# Altium PCB PCB1.PcbDoc
Units mil, origin at the board's own origin, x right, y up, seen from the top; angles counter-clockwise.
Board outline 4083.65 x 2776.57 mil, 2 copper layers (Top Layer, Bottom Layer); 64 components, 28 nets, 238 pads, 20 vias.
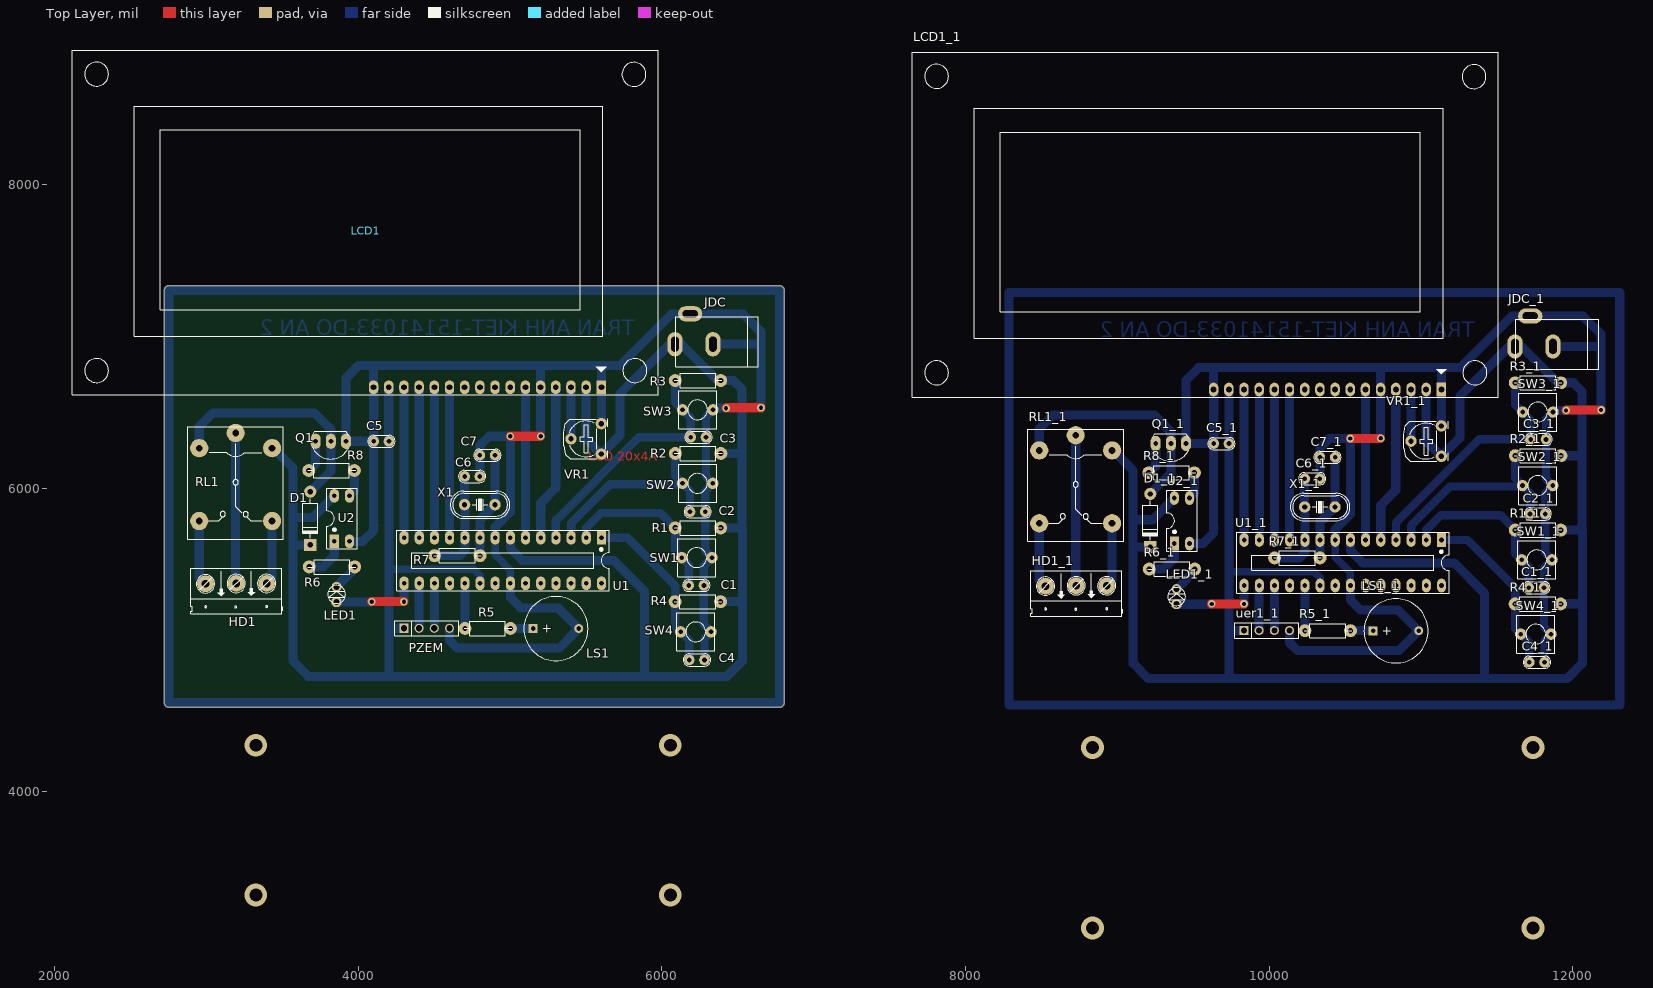
[diagram p0: Top Layer view]
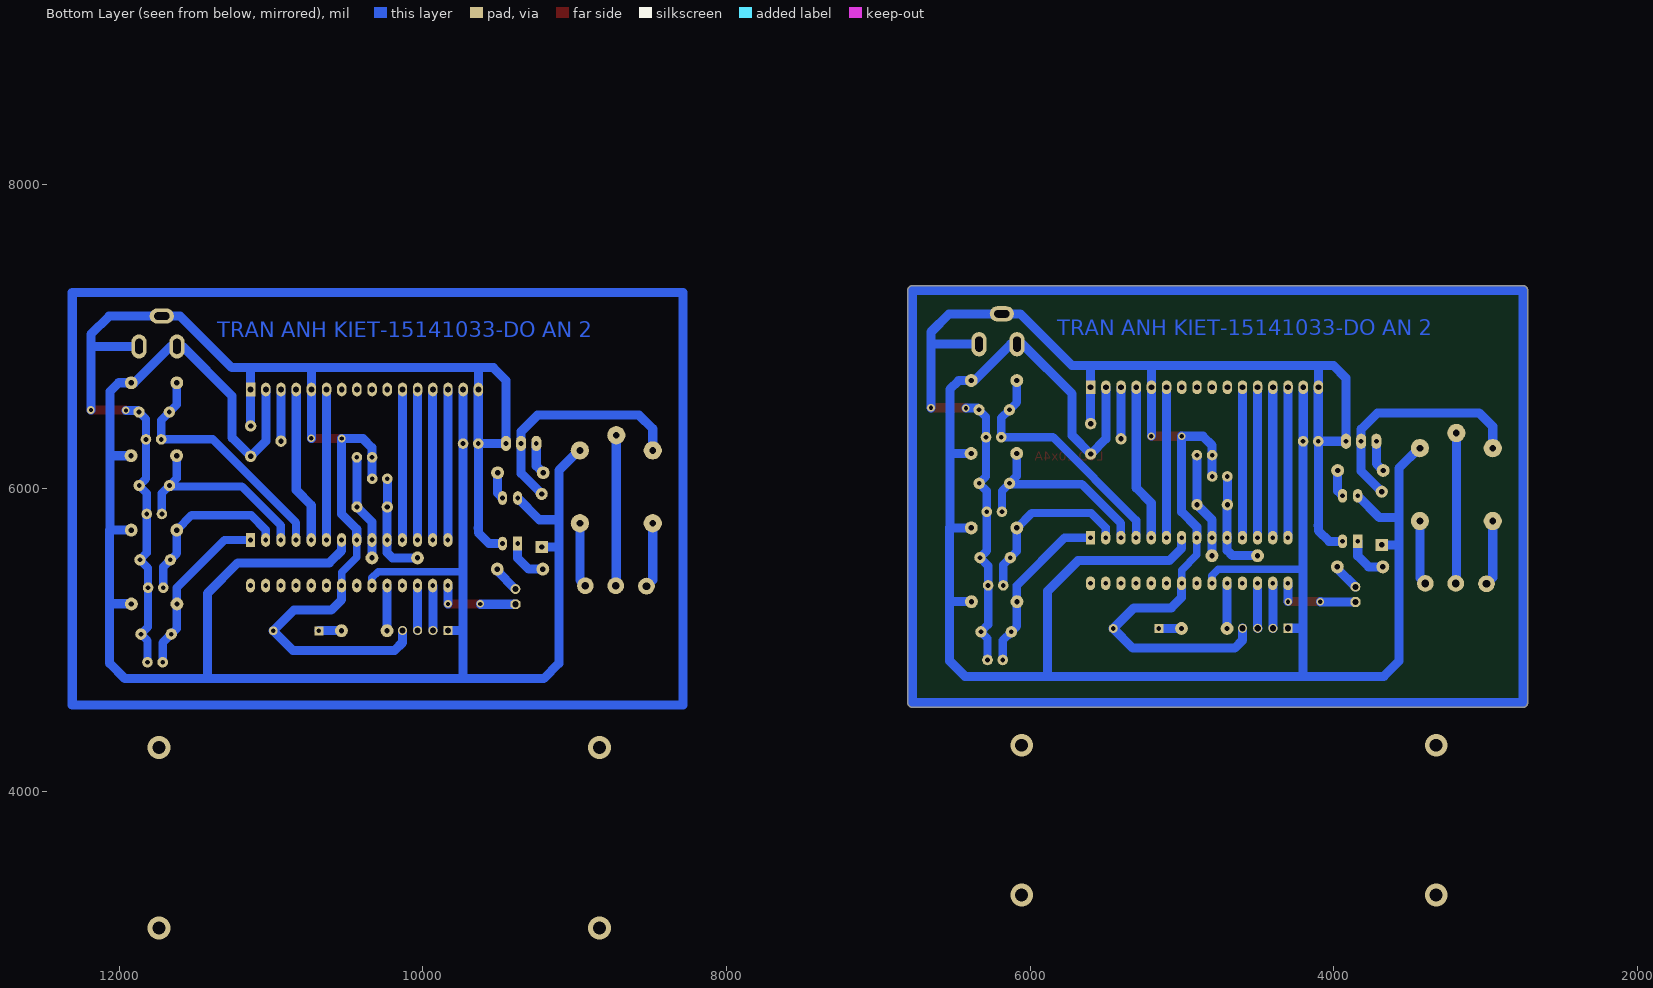
[diagram p1: Bottom Layer view, seen from below]

## Layer stack, top to bottom
Top Layer: signal copper 1.4
Dielectric: dielectric 12.6, FR-4, Dk 4.8
Bottom Layer: signal copper 1.4

## Board outline
2751.97,4556.6 cw(c2751.97,4586.61) 2721.95,4586.61 2721.95,7303.15 cw(c2751.97,7303.15) 2751.97,7333.16 6775.59,7333.16 cw(c6775.59,7303.15) 6805.61,7303.15 6805.61,4586.61 cw(c6775.59,4586.61) 6775.59,4556.6

## Design rules (kind name [scope] priority, off if disabled: settings)
Clearance [All] p1: gap=10
PolygonConnect [All] p1: connectstyle=Relief reliefconductorwidth=10 reliefentries=4 polygonreliefangle="90 Angle"
RoomDefinition SCHE [InComponentClass('SCHE')] p1: confinementstyle=ConfineIn formatcopy=TRUE lockcomponents=FALSE outline 7045,1065 10715,1065 10715,4365 7045,4365
RoutingVias [All] p1: holewidth=28 width=50 viastyle="Through Hole" minholewidth=28 minwidth=50 maxholewidth=28 maxwidth=50
SilkscreenOverComponentPads [All] p1: minsilkscreentomaskgap=10
SolderMaskExpansion [All] p1: expansion=4
Width [All] p1: maxlimit=60 minlimit=50 preferedwidth=55
27 further rules are at their usual default settings.

## Classes and differential pairs
component class SCHE: 100N C1 C2 C3 C4 C7 D1 HD1 JDC LED1 LS1 PZEM Q1 R1 R2 R3 R5 R7 RL1 SW1 SW2 SW3 SW4 U1 uer VR1 X1

## Components (designator, comment, footprint, x,y, rotation, side; value= is the part's Value field where it differs from the comment)
C1 "100n" CN1 6176.18,5359.25 r0 top
C1_1 "100n" CN1 11709.65,5344.49 r0 top (schematic designator C1)
C2 "100n" CN1 6185.04,5844.49 r0 top
C2_1 "100n" CN1 11718.5,5829.72 r0 top (schematic designator C2)
C3 "100n" CN1 6189.96,6335.63 r0 top
C3_1 "100n" CN1 11723.43,6320.87 r0 top (schematic designator C3)
C4 "100n" CN1 6180.12,4868.11 r0 top
C4_1 "100n" CN1 11713.58,4853.35 r0 top (schematic designator C4)
C5 "100n" CN1 4101.38,6308.07 r0 top
C5_1 "100n" CN1 9634.84,6293.31 r0 top (schematic designator C5)
C6 "22p" CN1 4800.2,6076.77 r180 top
C6_1 "22p" CN1 10333.66,6062.01 r180 top (schematic designator C6)
C7 "22p" CN1 4900.59,6217.52 r180 top
C7_1 "22p" CN1 10434.06,6202.76 r180 top (schematic designator C7)
D1 "1N4007" D1A 3683.07,5976.38 r90 top
D1_1 "1N4007" D1A 9216.54,5961.61 r90 top (schematic designator D1)
HD1 "Header 3" HED3 3395.67,5372.05 r180 top
HD1_1 "Header 3" HED3 8929.13,5357.28 r180 top (schematic designator HD1)
JDC "Jac DC" DC0 6210.63,7048.23 r180 top
JDC_1 "Jac DC" DC0 11744.09,7033.46 r180 top (schematic designator JDC)
LCD1 "LCD 20x4A" LCD20X4A 5600.39,6664.37 r180 top locked
LCD1_1 "LCD 20x4A" LCD20X4A 11133.86,6649.61 r180 top (schematic designator LCD1)
LED1 "LED" LED-3MM-YELLOW 3856.3,5250 r90 top
LED1_1 "LED" LED-3MM-YELLOW 9389.76,5235.24 r90 top (schematic designator LED1)
LS1 "SPEAKER" speaker 5151.57,5074.8 r0 top
LS1_1 "SPEAKER" speaker 10685.04,5060.04 r0 top (schematic designator LS1)
PZEM "JP4" JP4-C1T 4300.2,5076.77 r0 top (schematic designator uer1)
Q1 "C1815" QTO-92 3818.9,6309.06 r180 top
Q1_1 "C1815" QTO-92 9352.36,6294.29 r180 top (schematic designator Q1)
R1 "10k" RES-1/4W-SMALL 6247.05,5738.19 r180 top
R1_1 "10k" RES-1/4W-SMALL 11780.51,5723.43 r180 top (schematic designator R1)
R2 "10k" RES-1/4W-SMALL 6248.03,6228.35 r180 top
R2_1 "10k" RES-1/4W-SMALL 11781.5,6213.58 r180 top (schematic designator R2)
R3 "10k" RES-1/4W-SMALL 6247.05,6708.66 r180 top
R3_1 "10k" RES-1/4W-SMALL 11780.51,6693.9 r180 top (schematic designator R3)
R4 "10k" RES-1/4W-SMALL 6246.06,5251.97 r180 top
R4_1 "10k" RES-1/4W-SMALL 11779.53,5237.2 r180 top (schematic designator R4)
R5 "39" RES-1/4W-SMALL 4862.2,5075.79 r180 top
R5_1 "39" RES-1/4W-SMALL 10395.67,5061.02 r180 top (schematic designator R5)
R6 "1k" RES-1/4W-SMALL 3815.94,5481.3 r0 top
R6_1 "1k" RES-1/4W-SMALL 9349.41,5466.54 r0 top (schematic designator R6)
R7 "1M" RES-1/4W-SMALL 4661.42,5555.12 r180 top
R7_1 "1M" RES-1/4W-SMALL 10194.88,5540.35 r180 top (schematic designator R7)
R8 "1k" RES-1/4W-SMALL 3833.66,6116.14 r180 top
R8_1 "1k" RES-1/4W-SMALL 9367.13,6101.38 r180 top (schematic designator R8)
RL1 "Relay 10A/12V" RL_SPDT_10A 3191.93,6363.19 r270 top
RL1_1 "Relay 10A/12V" RL_SPDT_10A 8725.39,6348.43 r270 top (schematic designator RL1)
SW1 "UP" SW2 6129.92,5542.32 r0 top
SW1_1 "UP" SW2 11663.39,5527.56 r0 top (schematic designator SW1)
SW2 "DW" SW2 6134.84,6031.5 r0 top
SW2_1 "DW" SW2 11668.31,6016.73 r0 top (schematic designator SW2)
SW3 "DW" SW2 6135.83,6515.75 r0 top
SW3_1 "DW" SW2 11669.29,6500.98 r0 top (schematic designator SW3)
SW4 "RST" SW2 6123.39,5053.03 r0 top
SW4_1 "RST" SW2 11656.85,5038.26 r0 top (schematic designator SW4)
U1 "ATmega328-PU" DIP28 5601.38,5673.23 r180 top
U1_1 "ATmega328-PU" DIP28 11134.84,5658.46 r180 top (schematic designator U1)
U2 "PC817" DIP4/W0.3 3841.54,5649.61 r0 top
U2_1 "PC817" DIP4/W0.3 9375,5634.84 r0 top (schematic designator U2)
uer1_1 "JP4" JP4-C1T 9833.66,5062.01 r0 top (schematic designator uer1)
VR1 "10K" VR 5600.39,6224.41 r90 top
VR1_1 "10K" VR 11133.86,6209.65 r90 top (schematic designator VR1)
X1 "16M" XT2 4800.2,5890.75 r180 top
X1_1 "16M" XT2 10333.66,5875.98 r180 top (schematic designator X1)

## Footprints (in the part's own frame and the unit in brackets; to place one, negate y for a bottom-side part, rotate by r counter-clockwise, add the part's x,y. Pads: shape width x height; smd on the part's side, far side on the other; paste and mask are expansions set on the pad)
CN1 [mil]
  round 70 hole 31: 1(0,0) 2(100,0)
  silkscreen extent -40,-40 141,40, body extent -60,-30 170,37, height 265
D1A [mil] "Diode 1A, W 100mil, L 350mil"
  round 80 hole 35: 1(0,0)
  rect 80x80 hole 35: 2(-350,0)
  silkscreen extent -305,-50 -45,50, body extent -386,-33 34,36, height 84
DC0 [mil] "Jac DC input"
  oval 100x160 hole 50 slot 100 at 90 deg: 1(125,100) 2(-125,100)
  oval 160x100 hole 50 slot 100 at 0 deg: 3(25,-100)
  silkscreen extent -425,-80 120,250, body extent -410,-105 134,269, height 434
DIP4/W0.3 [mil] "4 PIN, W 300mil, Pin to pin 100mil"
  rect 60x90 hole 31: 1(0,0)
  oval 60x90 hole 31: 2(100,0) 3(100,300) 4(0,300)
  silkscreen extent -50,-50 150,350, body extent -59,-10 159,305, height 170
DIP28 [mil] "DIP, 18-Leads, Row Spacing 7.62mm, Pitch 2.54mm, Body 22.8x7.3mm, Window"
  rect 60x90 hole 31: 1(0,0)
  oval 60x90 hole 31: 2(100,0) 3(200,0) 4(300,0) 5(400,0) 6(500,0) 7(600,0) 8(700,0) 9(800,0) 10(900,0) 11(1000,0) 12(1100,0) 13(1200,0) 14(1300,0) 15(1300,300) 16(1200,300) 17(1100,300) 18(1000,300) 19(900,300) 20(800,300) 21(700,300) 22(600,300) 23(500,300) 24(400,300) 25(300,300) 26(200,300) 27(100,300) 28(0,300)
  silkscreen extent -50,-50 1350,350, body extent -50,-10 1367,300, height 200
HED3 [mil] "Header 3, 3 pin, hight 300mil, Pin to Pin 200, Colour Green"
  round 110 hole 50: 1(0,0) 2(200,0) 3(402.62,2.62)
  silkscreen extent -106,-100 500,200
JP4-C1T [mm] "4 row, straight, gold plating"
  rect 1.52x1.52 hole 1.02: 1(0,0)
  round 1.52 hole 1.02: 2(2.54,0) 3(5.08,0) 4(7.62,0)
  silkscreen extent -1.52,-1.27 9.14,1.27, body extent -1.52,-1.25 9.14,1.25, height 8.51
LCD20X4A [mil] "LCD dipslay 20x4, 16 pin"
  rect 62x90 hole 39: 1(0,0)
  oval 62x90 hole 39: 2(100,0) 3(200,0) 4(300,0) 5(400,0) 6(500,0) 7(600,0) 8(700,0) 9(800,0) 10(900,0) 11(1000,0) 12(1100,0) 13(1200,0) 14(1300,0) 15(1400,0) 16(1500,0)
  round 157.48 on Top Paste: "Hole 0"(-220,-110) "Hole 0"(-215,-2060) "Hole 0"(3325,-110) "Hole 0"(3325,-2065)
  silkscreen extent -375,-2220 3485,50, body extent -392,-2264 3466,98, height 417
LED-3MM-YELLOW [mil]
  oct 65x65 hole 40: 1(0,0)
  round 65 hole 40: 2(100,0)
  silkscreen extent -9,-59 109,59, body extent -27,-77 117,80, height 181
QTO-92 [mil] "TO-92"
  oval 66x100 hole 32: 1(-100,0) 2(0,0) 3(100,0)
  silkscreen extent -117,-65 120,118, body extent -109,-66 109,95, height 245
RES-1/4W-SMALL [mil]
  round 85 hole 35: 1(-140,0) 2(160,0)
  silkscreen extent -148,-47 166,47, body extent -152,-47 172,47, height 97
RL_SPDT_10A [mil] "Relay SPDT, 5 pin, 10A,W 650mil, L 800mil, H 800mil"
  round 120 hole 45: 1(0,0) 2(580,240) 3(580,-240) 4(100,-240) 5(100,240)
  silkscreen extent -40,-315 700,315, body extent -46,-304 706,306, height 602
speaker [mm]
  rect 1.5x1.5 hole 0.8: 1(0,0)
  round 1.5 hole 0.8: 2(7.62,0.013)
  silkscreen extent -1.55,-5.38 9.18,5.36, body extent -2.22,-6 13.24,6, height 4.5
SW2 [mil] "SW button 2pin, 250x 250 mil"
  round 75 hole 31: 1(0,0) 2(200,0)
  silkscreen extent -25,-125 225,125
VR [mil] "Resistor Variable"
  round 75 hole 35: 1(0,0) 2(100,200) 3(200,0)
  silkscreen extent -31,-44 231,246, body extent -87,-30 307,372, height 165
XT2 [mil] "Footpin for Crystal 2 pin"
  round 75 hole 34: 1(-100,0) 2(100,0)
  silkscreen extent -198,-90 195,90, body extent -233,-93 213,90, height 138

## Part data
C1 C1_1 C2 C2_1 C3 C3_1 C4 C4_1 C5 C5_1 C6 C6_1 C7 C7_1: library part CN1, "Cap np  1pF - 472pF"
D1 D1_1: library part D1A, "Diode 1A"
HD1 HD1_1: library part Hed3, "Header 3 (Green)"
JDC JDC_1: library part DCIN, "Jac DC input"
LCD1 LCD1_1: library part LCD20x4A, "LCD dipslay 20 char, 4 line"
LED1 LED1_1: "LED Single colour Green and Red"
PZEM uer1_1: "WR-PHD 2.54 mm Angled Socket Header"
Q1 Q1_1: "NPN 600mW, ECB"
R1 R1_1 R2 R2_1 R3 R3_1 R4 R4_1 R5 R5_1 R6 R6_1 R7 R7_1 R8 R8_1: library part Res, "Res"
RL1 RL1_1: library part "Relay 1", "Relay SPDT,10A - 12VDC 5 Pin"
SW1 SW1_1 SW2 SW2_1 SW3 SW3_1 SW4 SW4_1: library part SW2, "Switch button 2 pin"
U1 U1_1: "8-bit AVR Microcontroller, 32KB Flash, 1KB EEPROM, 2KB SRAM, 28-pin PDIP, Industrial Grade (-40°C to 85°C)"
U2 U2_1: "Single Opto"
VR1 VR1_1: library part VR, "Var Resistor"
X1 X1_1: library part XT2, "Crystal For all Crystal 2pin."

## Via types
v1: diameter 50, hole 28, Top Layer to Bottom Layer, 12 vias
v2: diameter 150, hole 85, Top Layer to Bottom Layer, 8 vias

## Nets (pads, with @x,y where several pads share a name; then routed paths per layer and width w, separated by ;. In a path a pad name is that pad's centre, name@x,y a point inside that pad or via, vN(x,y) a via of type N, cw(c..) or ccw(c..) an arc to the next point about the centre after c; other vN are vias at no path point)
DW: C2.1 R2.2 SW2.1 U1.3 | length 1361.7
  Bottom Layer w55: U1.3 5401.38,5768.5 5658.46,6025.59 6128.94,6025.59 SW2.1 ; R2.2 6088.03,6078.31 SW2.1 ; C2.1 6185.04,5981.3 SW2.1
GND: C1.2 C2.2 C3.2 C4.2 C5.1 C6.1 C7.2 JDC.2 JDC.3 LCD1.1 LCD1.5 LCD1.16 LS1.2 PZEM.4 Q1.1 SW1.2 SW2.2 SW3.2 SW4.2 U1.8 U1.22 U2.2 VR1.3 | length 11909.9
  Top Layer w60: v1(5000.98,6341.54) v1@5199.8,6341.54 ; v1(6422.24,6526.57) 6425.2,6529.53 v1(6652.56,6529.53)
  Bottom Layer w50: U1.8 4901.38,5560.24 5001.38,5460.24 U1.22
  Bottom Layer w55: C4.2 6280.12,5009.76 SW4.2 6276.18,5100.23 C1.2 6276.18,5488.58 SW1.2 6285.04,5587.2 C2.2 6285.04,5981.69 SW2.2 6289.96,6076.38 C3.2 6289.96,6469.88 SW3.2
  Bottom Layer w60: U2.2 4029.53,5649.61 4100.39,5720.47 4100.39,5753.94 ; C5.1@4100.39,6309.06 Q1.1 3918.9,6725 4001.97,6808.07 4102.36,6808.07 ; 4101.38,5752.95 4100.39,5753.94 ; PZEM.4 4600.2,4997.83 4652.17,4945.87 5322.14,4945.87 LS1.2 5315.26,5211.61 5069.88,5211.61 5001.38,5280.12 U1.22 ; C6.1 4800.2,6217.13 C7.2 4801.57,6218.5 4801.57,6281.89 4861.22,6341.54 v1(5000.98,6341.54) 5000.98,5843.5 4901.38,5743.9 U1.8 ; LCD1.5 5200.39,6805.71 5202.76,6808.07 ; v1(5200.79,6342.52) LCD1.5@5200.79,6663.98 ; VR1.3 LCD1.1 5600.39,6795.28 ; JDC.2 6647.05,6948.23 6652.56,6953.74 ; SW3.2 6346.65,6526.57 v1(6422.24,6526.57) ; v1(6652.56,6529.53) 6652.56,6953.74 ; 4100.39,5753.94 4100.39,6297.24 4101.38,6298.23 C5.1 4101.38,6663.39 LCD1.16 4100.39,6806.1 4102.36,6808.07 ; 4102.36,6808.07 5202.76,6808.07 ; 5202.76,6808.07 5724.41,6808.07 6064.57,7148.23 JDC.3 6532.87,7148.23 6652.56,7028.54 6652.56,6953.74
MODE: C3.1 R3.2 SW3.1 U1.4 | length 1645.6
  Bottom Layer w55: U1.4 5301.38,5787.6 5849.41,6335.63 C3.1 6189.96,6461.61 SW3.1 6087.05,6564.53 R3.2
NetC4_1: C4.1 R4.2 SW4.1 U1.1 | length 1145.2
  Bottom Layer w55: U1.1 5772.64,5673.23 6087.05,5358.82 6087.05,5252.95 6087.05,5089.37 SW4.1 6180.12,4996.3 C4.1
NetC6_2: C6.2 R7.2 U1.10 X1.2 | length 699.9
  Bottom Layer w60: R7.2 4666.34,5555.12 4701.38,5590.16 U1.10 X1.2@4701.38,5889.57 ; X1.2 C6.2
NetC7_1: C7.1 R7.1 U1.9 X1.1 | length 703.5
  Bottom Layer w60: R7.1 4801.38,5555.16 U1.9 4801.38,5791.93 X1.1 4900.59,5891.14 C7.1
NetD1_1: D1.1 Q1.2 RL1.4 | length 1559.4
  Bottom Layer w60: RL1.4 2951.93,6405.67 3042.32,6496.06 3710.63,6496.06 3818.9,6387.8 Q1.2 3818.9,6112.2 D1.1
NetHD1_1: HD1.1 RL1.2 | length 426.2
  Bottom Layer w60: HD1.1 3431.93,5408.31 RL1.2
NetHD1_2: HD1.2 RL1.1 | length 987.4
  Bottom Layer w60: HD1.2@3191.93,5375.79 RL1.1
NetHD1_3: HD1.3 RL1.3 | length 430.8
  Bottom Layer w60: RL1.3 2951.93,5410.55 HD1.3
NetLCD1_3: LCD1.3 VR1.2 | length 340
  Bottom Layer w60: VR1.2 LCD1.3
NetLCD1_4: LCD1.4 U1.5 | length 1031.6
  Bottom Layer w60: U1.5 5201.38,5902.17 5301.38,6002.17 ; 5300.39,6003.15 LCD1.4
NetLCD1_6: LCD1.6 U1.6 | length 990.2
  Bottom Layer w60: U1.6@5100.39,5674.21 LCD1.6
NetLCD1_11: LCD1.11 U1.11 | length 990.2
  Bottom Layer w60: U1.11 LCD1.11@4601.38,6663.39
NetLCD1_12: LCD1.12 U1.12 | length 990.2
  Bottom Layer w60: U1.12@4500.39,5674.21 LCD1.12
NetLCD1_13: LCD1.13 U1.13 | length 990.2
  Bottom Layer w60: U1.13 LCD1.13@4401.38,6663.39
NetLCD1_14: LCD1.14 U1.14 | length 990.2
  Bottom Layer w60: U1.14@4300.39,5674.21 LCD1.14
NetLED1_1: LED1.1 U1.15 | length 564.8
  Top Layer w60: v1(4087.6,5251.97) v1(4300.2,5251.97)
  Bottom Layer w60: LED1.1 4085.63,5250 v1(4087.6,5251.97) ; v1@4301.38,5253.15 U1.15
NetLED1_2: LED1.2 R6.2 | length 180.9
  Bottom Layer w60: LED1.2 3975.94,5469.65 R6.2
NetLS1_1: LS1.1 R5.1 | length 148.4
  Bottom Layer w60: R5.1 LS1.1@5150.59,5075.79
NetQ1_3: Q1.3 R8.2 | length 215.9
  Bottom Layer w60: R8.2@3670.67,6119.13 R8.2 3718.9,6161.38 Q1.3
NetR5_2: R5.2 U1.19 | length 299
  Bottom Layer w60: R5.2 4701.38,5076.61 U1.19 U1.19@4702.2,5372.4
NetR6_1: R6.1 U2.1 | length 291.2
  Bottom Layer w60: R6.1 3768.7,5481.3 3841.54,5554.13 U2.1
NetR8_1: R8.1 U2.3 | length 179.8
  Bottom Layer w60: U2.3 3973.66,5981.73 R8.1
NetU1_16: PZEM.2 U1.16 | length 300.9
  Bottom Layer w60: PZEM.2 4400.2,5372.05 U1.16 U1.16@4401.38,5377.17
NetU1_17: PZEM.3 U1.17 | length 296.9
  Bottom Layer w60: PZEM.3 4501.38,5077.95 U1.17
UP: C1.1 R1.2 SW1.1 U1.2 | length 1149.4
  Bottom Layer w55: U1.2 5501.38,5740.55 5597.44,5836.61 5988.62,5836.61 R1.2 6087.05,5585.2 SW1.1 6176.18,5496.06 C1.1
VCC: C5.2 D1.2 JDC.1 LCD1.2 LCD1.15 PZEM.1 R1.1 R2.1 R3.1 R4.1 RL1.5 U1.7 U1.20 U2.4 VR1.1 | length 13472.9
  Bottom Layer w50: 4201.38,5464.57 4759.84,5464.57 4801.38,5423.03 U1.20
  Bottom Layer w60: RL1.5 3437.6,6263.19 3569.88,6130.91 3569.88,5806.1 ; 3571.26,5626.38 D1.2 D1.2@3677.36,5632.09 ; U2.4 3698.03,5806.1 3569.88,5806.1 ; LCD1.15 4200.39,6309.06 C5.2 4201.38,5464.57 4201.38,5078.74 ; PZEM.1 4203.35,5076.77 4201.38,5078.74 ; U1.7 5001.38,5603.94 5082.68,5522.64 5684.06,5522.64 5884.84,5321.85 5884.84,4765.75 ; LCD1.2 5500.39,6324.41 VR1.1 5722.44,6346.46 5722.44,6621.06 6049.61,6948.23 JDC.1 6127.56,6948.23 6367.13,6708.66 R3.1 ; R4.1@6387.05,5252.95 6529.53,5252.95 ; R1.1 6527.56,5738.19 ; R3.1@6387.05,6717.28 R3.1 ; R2.1 6527.56,6228.35 ; 3569.88,5806.1 3569.88,4860.24 3670.28,4759.84 4200.79,4759.84 ; 4200.79,4759.84 6428.15,4759.84 6529.53,4861.22 6529.53,5252.95 ; 4200.79,4759.84 4201.38,4760.43 4201.38,5078.74 ; R3.1 6469.49,6708.66 6527.56,6650.59 6527.56,6228.35 ; 6527.56,5738.19 6529.53,5740.16 6529.53,5252.95 ; 6527.56,5738.19 6527.56,6228.35
pads on no net: "LCD1.Hole 0" "LCD1_1.Hole 0" C1_1.1 C1_1.2 C2_1.1 C2_1.2 C3_1.1 C3_1.2 C4_1.1 C4_1.2 C5_1.1 C5_1.2 C6_1.1 C6_1.2 C7_1.1 C7_1.2 D1_1.1 D1_1.2 HD1_1.1 HD1_1.2 HD1_1.3 JDC_1.1 JDC_1.2 JDC_1.3 LCD1.7 LCD1.8 LCD1.9 LCD1.10 LCD1_1.1 LCD1_1.2 LCD1_1.3 LCD1_1.4 LCD1_1.5 LCD1_1.6 LCD1_1.7 LCD1_1.8 LCD1_1.9 LCD1_1.10 LCD1_1.11 LCD1_1.12 LCD1_1.13 LCD1_1.14 LCD1_1.15 LCD1_1.16 LED1_1.1 LED1_1.2 LS1_1.1 LS1_1.2 Q1_1.1 Q1_1.2 Q1_1.3 R1_1.1 R1_1.2 R2_1.1 R2_1.2 R3_1.1 R3_1.2 R4_1.1 R4_1.2 R5_1.1 R5_1.2 R6_1.1 R6_1.2 R7_1.1 R7_1.2 R8_1.1 R8_1.2 RL1_1.1 RL1_1.2 RL1_1.3 RL1_1.4 RL1_1.5 SW1_1.1 SW1_1.2 SW2_1.1 SW2_1.2 SW3_1.1 SW3_1.2 SW4_1.1 SW4_1.2 U1.18 U1.21 U1.23 U1.24 U1.25 U1.26 U1.27 U1.28 U1_1.1 U1_1.2 U1_1.3 U1_1.4 U1_1.5 U1_1.6 U1_1.7 U1_1.8 U1_1.9 U1_1.10 U1_1.11 U1_1.12 U1_1.13 U1_1.14 U1_1.15 U1_1.16 U1_1.17 U1_1.18 U1_1.19 U1_1.20 U1_1.21 U1_1.22 U1_1.23 U1_1.24 U1_1.25 U1_1.26 U1_1.27 U1_1.28 U2_1.1 U2_1.2 U2_1.3 U2_1.4 uer1_1.1 uer1_1.2 uer1_1.3 uer1_1.4 VR1_1.1 VR1_1.2 VR1_1.3 X1_1.1 X1_1.2
copper on no net: | length 71256
  Top Layer w60: v1(9621.06,5237.2) v1(9833.66,5237.2) ; v1(10534.45,6326.77) v1@10733.27,6326.77 ; v1(11955.71,6511.81) 11958.66,6514.76 v1(12186.02,6514.76)
  Bottom Layer w50: 9734.84,5449.8 10293.31,5449.8 10334.84,5408.27 10334.84,5358.46 ; 10434.84,5658.46 10434.84,5545.47 10534.84,5445.47 10534.84,5358.46
  Bottom Layer w55: 10834.84,5658.46 10834.84,5772.83 11382.87,6320.87 11723.43,6320.87 11723.43,6446.85 11669.29,6500.98 11620.51,6549.76 11620.51,6693.9 ; 10934.84,5658.46 10934.84,5753.74 11191.93,6010.83 11662.4,6010.83 11668.31,6016.73 ; 11034.84,5658.46 11034.84,5725.79 11130.91,5821.85 11522.09,5821.85 11620.51,5723.43 11620.51,5570.43 11663.39,5527.56 11709.65,5481.3 11709.65,5344.49 ; 11134.84,5658.46 11306.1,5658.46 11620.51,5344.06 11620.51,5238.19 11620.51,5074.6 11656.85,5038.26 11713.58,4981.53 11713.58,4853.35 ; 11621.5,6213.58 11621.5,6063.54 11668.31,6016.73 ; 11718.5,5829.72 11718.5,5966.54 11668.31,6016.73 ; 11813.58,4853.35 11813.58,4995 11856.85,5038.26 11809.65,5085.47 11809.65,5344.49 11809.65,5473.82 11863.39,5527.56 11818.5,5572.44 11818.5,5829.72 11818.5,5966.93 11868.31,6016.73 11823.43,6061.61 11823.43,6320.87 11823.43,6455.12 11869.29,6500.98
  Bottom Layer w60: 4700.2,5674.41 4701.38,5673.23 ; 8485.39,5768.43 8485.39,5395.79 8526.51,5354.66 ; 8485.39,6248.43 8485.39,6390.91 8575.79,6481.3 9244.09,6481.3 9352.36,6373.03 9352.36,6294.29 9352.36,6097.44 9216.54,5961.61 ; 8725.39,5361.02 8725.39,6348.43 ; 8929.13,5357.28 8965.39,5393.54 8965.39,5768.43 ; 8965.39,6248.43 8971.06,6248.43 9103.35,6116.14 9103.35,5791.34 ; 9104.72,5611.61 9216.54,5611.61 9210.83,5617.32 ; 9204.13,6104.37 9207.13,6101.38 9252.36,6146.61 9252.36,6294.29 ; 9209.41,5466.54 9302.17,5466.54 9375,5539.37 9375,5634.84 ; 9375,5934.84 9231.5,5791.34 9103.35,5791.34 ; 9389.76,5235.24 9619.09,5235.24 v1(9621.06,5237.2) ; 9389.76,5335.24 9509.41,5454.88 9509.41,5466.54 ; 9475,5634.84 9562.99,5634.84 9633.86,5705.71 9633.86,5739.17 ; 9475,5934.84 9507.13,5966.97 9507.13,6101.38 ; 9633.86,6294.29 9452.36,6294.29 9452.36,6710.24 9535.43,6793.31 9635.83,6793.31 ; 9634.84,5738.19 9633.86,5739.17 ; 9733.86,6649.61 9733.86,6294.29 9734.84,6293.31 9734.84,5449.8 9734.84,5063.98 ; 9833.66,5062.01 9736.81,5062.01 9734.84,5063.98 ; 9833.86,5659.45 9833.86,6649.61 ; v1@9834.84,5238.39 9834.84,5358.46 ; 9933.66,5062.01 9933.66,5357.28 9934.84,5358.46 9934.84,5362.4 ; 9934.84,5658.46 9934.84,6648.62 ; 10033.66,5062.01 10034.84,5063.19 10034.84,5358.46 ; 10033.86,5659.45 10033.86,6649.61 ; 10034.88,5540.35 10199.8,5540.35 10234.84,5575.39 10234.84,5658.46 ; 10133.66,5062.01 10133.66,4983.07 10185.63,4931.1 10855.6,4931.1 10985.04,5060.54 10848.73,5196.85 10603.35,5196.85 10534.84,5265.35 10534.84,5358.46 ; 10134.84,5658.46 10134.84,6648.62 ; 10233.66,5659.65 10234.84,5658.46 ; 10233.66,5875.98 10233.66,6062.01 ; 10234.84,5874.8 10234.84,5658.46 ; 10235.67,5061.02 10234.84,5061.85 10234.84,5358.46 10235.67,5357.64 ; 10333.66,6062.01 10333.66,6202.36 10334.06,6202.76 10335.04,6203.74 10335.04,6267.13 10394.69,6326.77 v1(10534.45,6326.77) 10534.45,5828.74 10434.84,5729.13 10434.84,5658.46 ; 10334.88,5540.35 10334.84,5540.39 10334.84,5658.46 10334.84,5777.17 10433.66,5875.98 10434.06,5876.38 10434.06,6202.76 ; 10534.84,5658.46 10534.84,5589.17 10616.14,5507.87 11217.52,5507.87 11418.31,5307.09 11418.31,4750.98 ; 10535.67,5061.02 10684.06,5061.02 ; 10633.86,5659.45 10633.86,6649.61 ; 10733.86,6649.61 10733.86,6790.94 10736.22,6793.31 ; v1(10734.25,6327.76) 10734.25,6649.21 ; 10734.84,5658.46 10734.84,5887.4 10834.84,5987.4 ; 10833.86,5988.39 10833.86,6649.61 ; 10933.86,6309.65 10933.86,6649.61 ; 11033.86,6649.61 11033.86,6309.65 11133.86,6209.65 11255.91,6331.69 11255.91,6606.3 11583.07,6933.46 11619.09,6933.46 11661.02,6933.46 11900.59,6693.9 11920.51,6693.9 ; 11133.86,6409.65 11133.86,6649.61 11133.86,6780.51 ; 11869.09,6933.46 12180.51,6933.46 12186.02,6938.98 ; 11869.29,6500.98 11880.12,6511.81 v1(11955.71,6511.81) ; 11920.51,5238.19 12062.99,5238.19 ; 11920.51,5723.43 12061.02,5723.43 ; 11920.51,6702.52 11920.51,6693.9 ; 11921.5,6213.58 12061.02,6213.58 ; v1(12186.02,6514.76) 12186.02,6938.98 ; 9103.35,5791.34 9103.35,4845.47 9203.74,4745.08 9734.25,4745.08 ; 9633.86,5739.17 9633.86,6282.48 9634.84,6283.46 9634.84,6293.31 9634.84,6648.62 9633.86,6649.61 9633.86,6791.34 9635.83,6793.31 ; 9635.83,6793.31 10736.22,6793.31 ; 9734.25,4745.08 9734.84,4745.67 9734.84,5063.98 ; 9734.25,4745.08 11961.61,4745.08 12062.99,4846.46 12062.99,5238.19 ; 10736.22,6793.31 11257.87,6793.31 11598.03,7133.46 11719.09,7133.46 12066.34,7133.46 12186.02,7013.78 12186.02,6938.98 ; 11920.51,6693.9 12002.95,6693.9 12061.02,6635.83 12061.02,6213.58 ; 12061.02,5723.43 12061.02,6213.58 ; 12061.02,5723.43 12062.99,5725.39 12062.99,5238.19 ; 2751.97,4586.61 2751.97,6568.9 2751.97,7303.15 5878.94,7303.15 6520.67,7303.15 6775.59,7303.15 6775.59,4586.61 2751.97,4586.61 ; 8285.43,4571.85 12309.06,4571.85 12309.06,7288.39 12054.13,7288.39 11412.4,7288.39 8285.43,7288.39 8285.43,6554.13 8285.43,4571.85
  other v2: 8836.61,3103.35 11738.19,3103.35 3324.8,3319.88 6055.12,3319.88 8836.61,4291.34 11738.19,4291.34 3324.8,4306.1 6055.12,4306.1

## Other copper
Bottom Layer:
  text "TRAN ANH KIET-15141033-DO AN 2" at 5819.88,7007.87 h100
  text "TRAN ANH KIET-15141033-DO AN 2" at 11353.35,6993.11 h100

## Text inside footprints (layer, text, board x,y; h text height)
LS1: Top Overlay "+" at 5207.07,5046.8 h60
LS1_1: Top Overlay "+" at 10740.54,5032.04 h60